# EAGLE board layout_da_pcb_eagle (EAGLE 9.7.0)
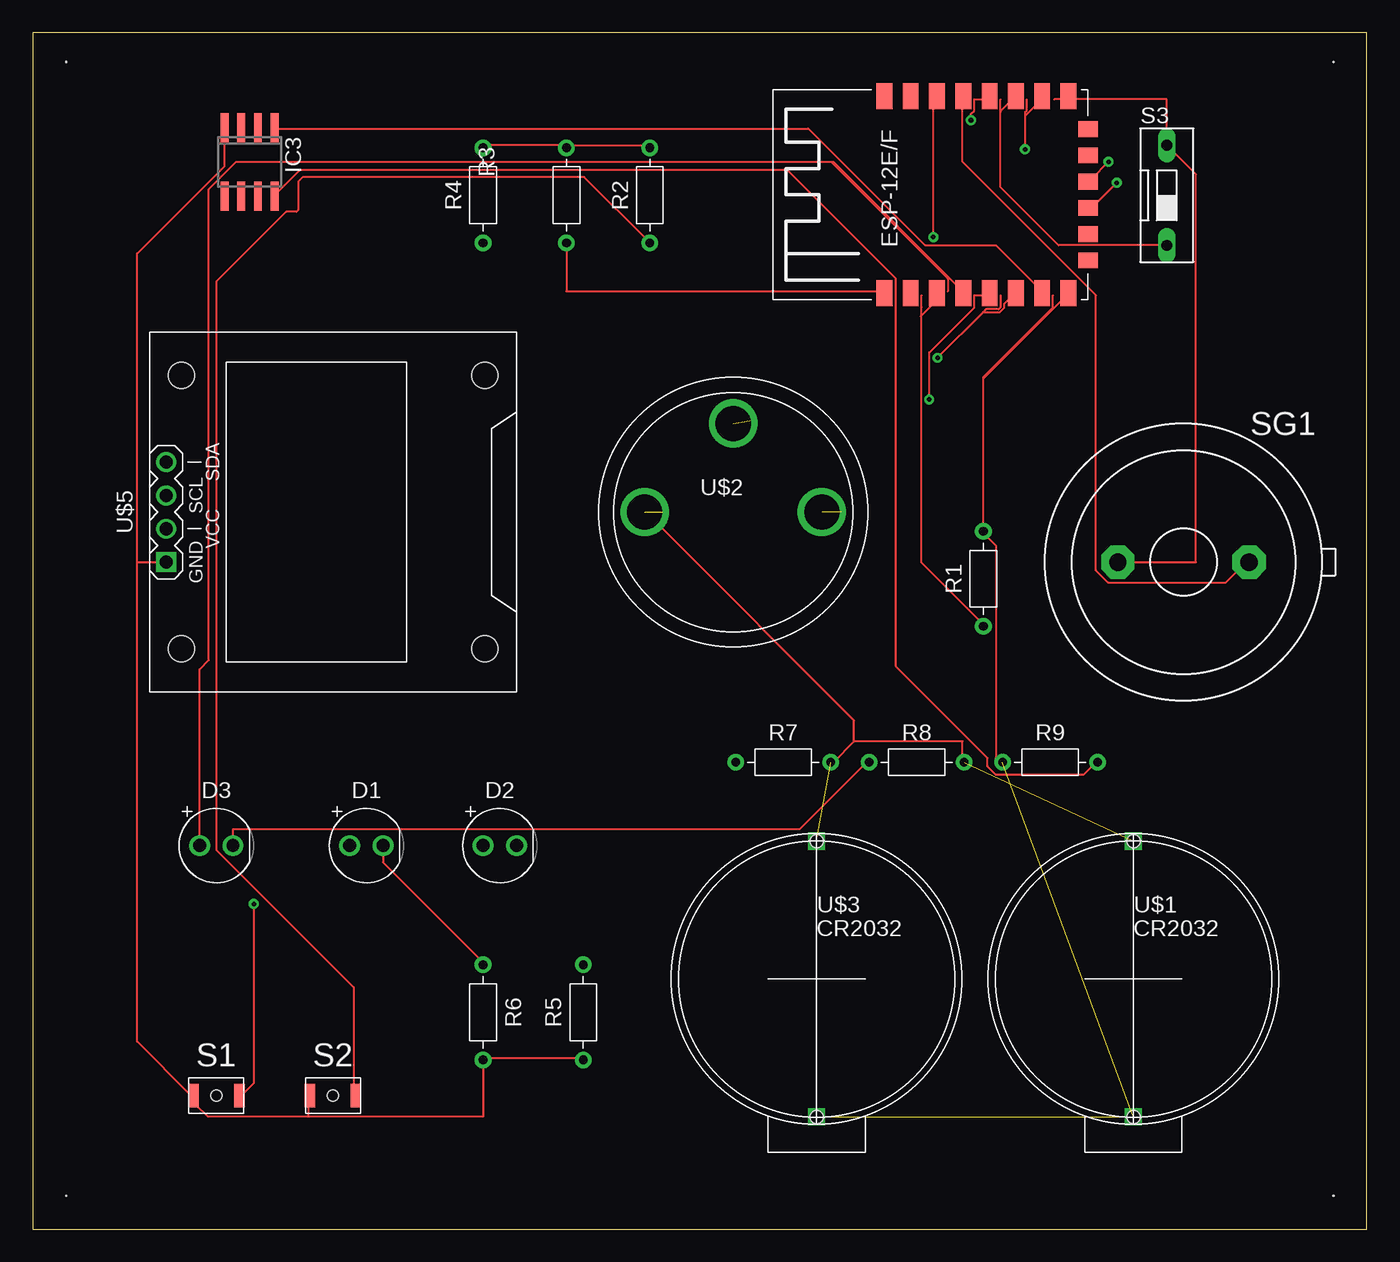
[diagram p0: board, top side]
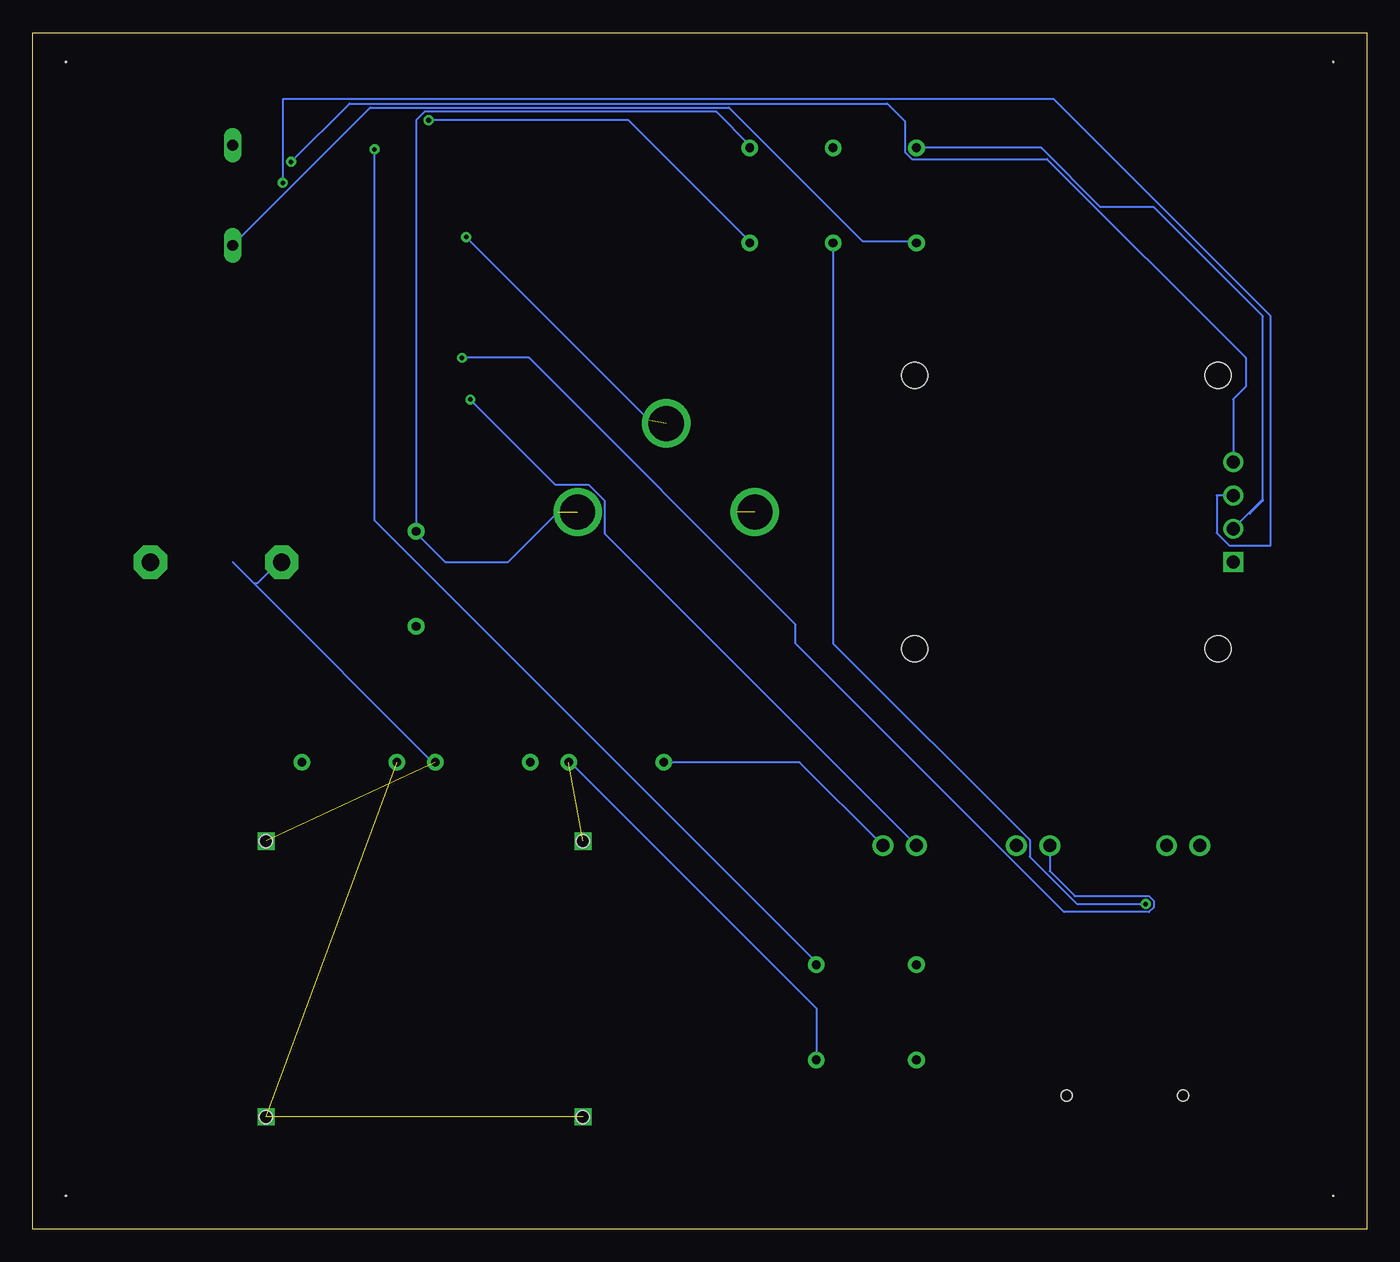
[diagram p1: board, bottom side, seen from below]

Size 101.58 x 91.11 mm. Coordinates in mm from the lower left corner, seen from the top.
Outline: 0,0 101.58,0 101.58,91.11 0,91.11 0,0
Copper layers (1*16): Top 0.035mm / dielectric 1.5mm / Bottom 0.035mm
Design rules "default": minimum track width 6mil, minimum drill 0.35mm, track to track 6mil, track to pad 6mil, pad to pad 6mil, via to via 6mil, smd to smd 6mil, copper to edge 40mil, drill to drill 6mil, minimum pad ring 10mil, minimum via ring 8mil, stop-mask expansion 4mil, vias tented up to drill 0mil, thermal gap 10mil
Holes 0.08 mm at 2.54,88.9 99.06,88.9 99.06,2.54 2.54,2.54

## Footprints (pad centres in the part's own frame; a part is rotated, then mirrored left to right if it is on the bottom)
LEDRD254W60D565H860B_B = drill 0.981 pad 1.581: 1 -1.27,0; 2 1.27,0
LEDRD254W60D565H860B = drill 0.981 pad 1.581: 1 -1.27,0; 2 1.27,0
LEDRD254W60D565H860B_Y = drill 0.981 pad 1.581: 1 -1.27,0; 2 1.27,0
ESP-12E = smd 2 x 1.2: ADC -7.46,5.53; EN -7.46,3.53; GND 7.54,-6.47; IO0 7.54,-0.47; IO2 7.54,-2.47; IO4 7.54,1.53; IO5 7.54,3.53; IO12 -7.46,-2.47; IO13 -7.46,-4.47; IO14 -7.46,-0.47; IO15 7.54,-4.47; IO16 -7.46,1.53; RST -7.46,7.53; RXD/IO3 7.54,5.53; TXD/IO1 7.54,7.53; VCC -7.46,-6.47 | smd 1.2 x 1.5: CS0 -4.96,-7.97; IO9 -0.96,-7.97; IO10 1.04,-7.97; MISO -2.96,-7.97; MOSI 3.04,-7.97; SCLK 5.04,-7.97
SO08 = smd 0.6 x 2.2: 1 -1.905,-2.6; 2 -0.635,-2.6; 3 0.635,-2.6; 4 1.905,-2.6; 5 1.905,2.6; 6 0.635,2.6; 7 -0.635,2.6; 8 -1.905,2.6
RESAD724W46L381D178B = drill 0.66 pad 1.26: 1 -3.62,0; 2 3.62,0
B3U-1000P(M)-B = smd 0.8 x 1.8: 1 -1.75,0; 2 1.75,0 | hole 0.85: 0,0
DS-01 = drill 0.813 long: 1 0,-3.81; 2 0,3.81
F/EE21P = drill 1.321 pad 2.54 octagon: 1 -5.004,0; 2 5.004,0
CR2032-20MM = drill 0.8 square: GND 0,10.5; VCC 0,-10.5 | hole 1: 0,10.5; 0,-10.5
3-ELECTRODE = drill 2.667: C 6.75,0; R -6.75,0; W 0,6.75
DISPLAY-OLED-128X64-I2C = drill 1 square: 1 -3.81,12.7 | drill 1: 2 -1.27,12.7; 3 1.27,12.7; 4 3.81,12.7 | hole 2: -10.414,11.557; 10.414,11.557; 10.414,-11.557; -10.414,-11.557

## Placement (x,y rotation side)
D1  LED_BLUE  [LEDRD254W60D565H860B_B]  25.4,29.21 0 top
D2  LED_RED  [LEDRD254W60D565H860B]  35.56,29.21 0 top
D3  LED_YELLOW  [LEDRD254W60D565H860B_Y]  13.97,29.21 0 top
IC1  ESP-12E/F  [ESP-12E]  72.39,78.74 90 top
IC3  LM35DM  [SO08]  16.51,81.28 180 top
R1  10KΩ  [RESAD724W46L381D178B]  72.39,49.53 90 top
R2  10KΩ  [RESAD724W46L381D178B]  46.99,78.74 90 top
R3  10KΩ  [RESAD724W46L381D178B]  40.64,78.74 90 top
R4  10KΩ  [RESAD724W46L381D178B]  34.29,78.74 90 top
R5  10KΩ  [RESAD724W46L381D178B]  41.91,16.51 90 top
R6  220Ω  [RESAD724W46L381D178B]  34.29,16.51 270 top
R7  220Ω  [RESAD724W46L381D178B]  57.15,35.56 0 top
R8  220Ω  [RESAD724W46L381D178B]  67.31,35.56 0 top
R9  220Ω  [RESAD724W46L381D178B]  77.47,35.56 0 top
S1  Reset  [B3U-1000P(M)-B]  13.97,10.16 0 top
S2  Upload  [B3U-1000P(M)-B]  22.86,10.16 0 top
S3  DS01  [DS-01]  86.36,78.74 0 top
SG1  F/EE21P  [F/EE21P]  87.63,50.8 0 top
U$1  CR2032  [CR2032-20MM]  83.82,19.05 0 top
U$2  3-ELECTRODE-GAS-SENSOR  [3-ELECTRODE]  53.34,54.61 0 top
U$3  CR2032  [CR2032-20MM]  59.69,19.05 0 top
U$5  DISPLAY-OLED-128X64-I2C  [DISPLAY-OLED-128X64-I2C]  22.86,54.61 90 top

## Library data of the parts
D1-D3 = Opto-Electronic; CATEGORY: Opto-Electronic; SUB-CATEGORY: LED
IC1 = esp-12e-f
IC3 = lm351
R1-R9 = Resistor; CATEGORY: Resistor; SUB-CATEGORY: Fixed
S1 S2 = Switch; CATEGORY: Switch; DESCRIPTION: Ultra-small Surface-mounting Tactile Switches with High Contact Reliability; MANUFACTURER: OMRON; OPERATING_TEMPERATURE: -25°C to +70°C at 60%RH max; PART_STATUS: ACTIVE; ROHS_COMPLIANCE: RoHS Compliant; SERIES: B3U; TYPE: Tactile
S3 = Switch; CATEGORY: SWITCH; TYPE: SPST
SG1 = buzzer
U$1 U$3 = cr20323
U$2 = senso_gas1; MANUFACTURER: Wearnes Cambion; MANUFACTURER#: 450-3326; QTY-PER-DEVICE: 3
U$5 = oled

## Nets
GND: IC1.GND IC3.4 R5.1 R6.2 R7.2 R8.2 S1.1 S2.1 S3.2 SG1.1 U$1.GND U$2.R U$3.GND U$5.1
N$1: IC1.RST R3.1 S1.2
N$2: IC1.IO15 R5.2
N$3: IC1.EN R1.1
N$4: IC1.IO2 R4.1 S3.1
N$5: IC1.IO0 R2.1 S2.2
N$6: IC1.IO4 SG1.2
N$7: IC1.IO5 U$2.W
N$8: IC1.IO13 IC3.1
N$9: D1.1 IC1.IO12
N$10: D2.1 IC1.IO14
N$11: D3.1 IC1.IO16
N$12: D1.2 R6.1
N$13: D2.2 R7.1
N$14: D3.2 R8.1
N$15: IC3.8 R9.2
N$16: IC1.IO10 U$5.4
N$17: IC1.IO9 U$5.3
VCC: IC1.VCC R1.2 R2.2 R3.2 R4.2 R9.1 U$1.VCC U$2.C U$3.VCC U$5.2

## Tracks (layer width: path | path; a pad name or v marks a point on that pad's centre or on a via)
GND  (3 unrouted)
  Top 0.152: 20.95,8.57 13.34,8.57 12.38,9.53 12.38,10.16 S1.1 12.06,10.16 7.94,14.29 7.94,50.8 | 20.95,8.57 20.95,10.16 S2.1 | R5.1 41.91,13.02 34.29,13.02 R6.2 34.29,8.57 20.95,8.57 | 79.06,86.04 86.36,86.04 S3.2 88.58,80.33 88.58,50.8 SG1.1 | 79.06,86.04 77.79,86.04 | 62.55,37.15 60.96,35.56 R7.2 | 62.55,37.15 70.8,37.15 70.8,35.56 R8.2 | 62.55,37.15 62.55,38.73 47.94,53.34 47.94,54.61 | 79.06,86.04 IC1.GND | IC3.4 14.61,80.96 7.94,74.3 7.94,50.8 | 7.94,50.8 U$5.1
  Bottom 0.152: 84.77,49.21 71.12,35.56 R8.2 | 84.77,49.21 86.36,50.8 | R5.1 41.91,16.83 60.64,35.56 R7.2 | 84.77,49.21 84.45,49.21 82.87,50.8 SG1.1
N$1  (via drill 0.35)
  Top 0.152: v16.83,24.77 16.83,11.11 15.88,10.16 S1.2 | R3.1 40.64,71.44 64.77,71.44 IC1.RST
  Bottom 0.152: v16.83,24.77 22.05,24.77 25.65,28.36 25.65,29.63 40.64,44.62 R3.1
N$2  (via drill 0.35)
  Top 0.152: 75.56,84.77 75.56,85.06 75.69,85.19 75.69,86.04 | 75.56,84.77 v75.56,82.23 | 75.56,84.77 76.83,86.04 IC1.IO15
  Bottom 0.152: v75.56,82.23 75.56,53.98 41.91,20.32 R5.2
N$3
  Top 0.152: R1.1 72.39,46.04 67.66,50.77 67.66,69.53 | 67.69,71.12 67.69,70.19 67.66,70.15 67.66,69.53 | IC1.EN 68.58,71.12 68.58,70.48 67.63,69.53 67.66,69.53
N$4
  Top 0.152: S3.1 78.11,74.93 73.69,79.35 73.69,85.09 | 73.69,85.09 73.69,86.04 | IC1.IO2 74.61,86.04 73.66,85.09 73.69,85.09
  Bottom 0.152: S3.1 75.88,85.41 48.58,85.41 38.42,75.25 34.29,75.25 R4.1
N$5  (via drill 0.35)
  Top 0.152: S2.2 24.45,10.16 24.45,18.41 13.97,28.89 13.97,72.15 19.29,77.47 20.08,77.47 20.21,77.61 20.21,79.78 20.56,80.13 41.98,80.13 R2.1 | v71.44,84.45 71.44,84.93 71.69,85.19 71.69,86.04 72.71,86.04 IC1.IO0
  Bottom 0.152: v71.44,84.45 56.2,84.45 46.99,75.25 R2.1
N$6
  Top 0.152: IC1.IO4 70.8,86.04 70.8,81.28 80.96,71.12 80.96,50.16 81.92,49.21 90.81,49.21 92.39,50.8 SG1.2
N$7  (via drill 0.35)  (1 unrouted)
  Top 0.152: v68.58,75.56 68.58,86.04 IC1.IO5
  Bottom 0.152: 54.61,61.59 v68.58,75.56
N$8
  Top 0.152: IC1.IO13 76.83,71.44 73.34,74.93 67.94,74.93 59.05,83.82 18.41,83.82 IC3.1
N$9  (via drill 0.35)
  Top 0.152: 73.69,71.12 73.69,70.19 73.56,70.05 72.59,70.05 72.39,69.85 | 72.39,69.85 v68.9,66.36 | 72.39,69.85 73.66,69.85 73.98,70.17 73.98,70.48 74.61,71.12 IC1.IO12
  Bottom 0.152: D1.1 24.13,27.27 22.23,25.37 16.58,25.37 16.22,25.02 16.22,24.51 16.58,24.16 23.06,24.16 43.48,44.58 43.48,46.04 63.8,66.36 v68.9,66.36
N$10  (via drill 0.35)
  Top 0.152: v68.26,63.18 68.26,66.76 71.69,70.19 71.69,71.12 72.71,71.12 IC1.IO14
  Bottom 0.152: v68.26,63.18 61.76,56.68 59.23,56.68 58.02,55.47 58.02,52.94 D2.1
N$11
  Top 0.152: D3.1 12.7,42.63 13.39,43.33 13.39,79.19 15.48,81.28 60.64,81.28 60.78,81.28 | 69.69,71.44 69.69,72.38 60.78,81.28 | 60.78,81.28 60.96,81.28 70.8,71.44 IC1.IO16
N$12
  Top 0.152: D1.2 26.67,27.94 34.29,20.32 R6.1
N$13
  Bottom 0.152: R7.1 43.18,35.56 D2.2
N$14
  Top 0.152: D3.2 15.24,30.48 58.42,30.48 63.5,35.56 R8.1
N$15
  Top 0.152: IC3.8 18.41,78.74 20.32,80.64 57.47,80.64 65.72,72.39 65.72,42.86 72.71,35.88 72.71,35.24 73.34,34.61 80.01,34.61 80.96,35.56 R9.2
N$16  (via drill 0.35)
  Top 0.152: v81.92,81.28 80.64,80.01 IC1.IO10
  Bottom 0.152: v81.92,81.28 77.47,85.72 36.51,85.72 35.15,84.36 35.15,82 34.65,81.5 24.35,81.5 9.21,66.36 9.21,64.16 10.16,63.21 U$5.4
N$17  (via drill 0.35)
  Top 0.152: v82.55,79.69 80.64,77.79 IC1.IO9
  Bottom 0.152: v82.55,79.69 82.55,86.04 23.81,86.04 7.3,69.53 7.3,52.07 10.48,52.07 11.43,53.02 11.43,55.88 U$5.3
VCC  (3 unrouted)
  Top 0.152: R9.1 73.66,35.56 73.34,35.88 73.34,52.07 72.39,53.02 R1.2 72.39,64.77 | 40.64,82.55 34.29,82.55 R4.2 | 40.64,82.55 46.99,82.55 R2.2 | 40.64,82.55 R3.2 | 77.69,71.12 77.69,70.19 72.39,64.89 72.39,64.77 | 72.39,64.77 78.74,71.12 IC1.VCC
  Bottom 0.152: R2.2 46.99,82.55 49.53,85.09 71.75,85.09 72.39,84.45 R1.2 72.39,53.02 70.17,50.8 65.41,50.8 61.59,54.61 | 7.91,55.56 7.91,69.53 16.23,77.85 20.27,77.85 24.78,82.36 R4.2 | 7.91,55.56 7.91,55.47 8.89,54.49 | U$5.2 7.94,55.56 7.91,55.56